# Altium PCB PCB2.PcbDoc
Units mil, origin at the board's own origin, x right, y up, seen from the top; angles counter-clockwise.
Board outline 3575 x 2655 mil, 2 copper layers (Top Layer, Bottom Layer); 31 components, 32 nets, 104 pads, 53 vias.
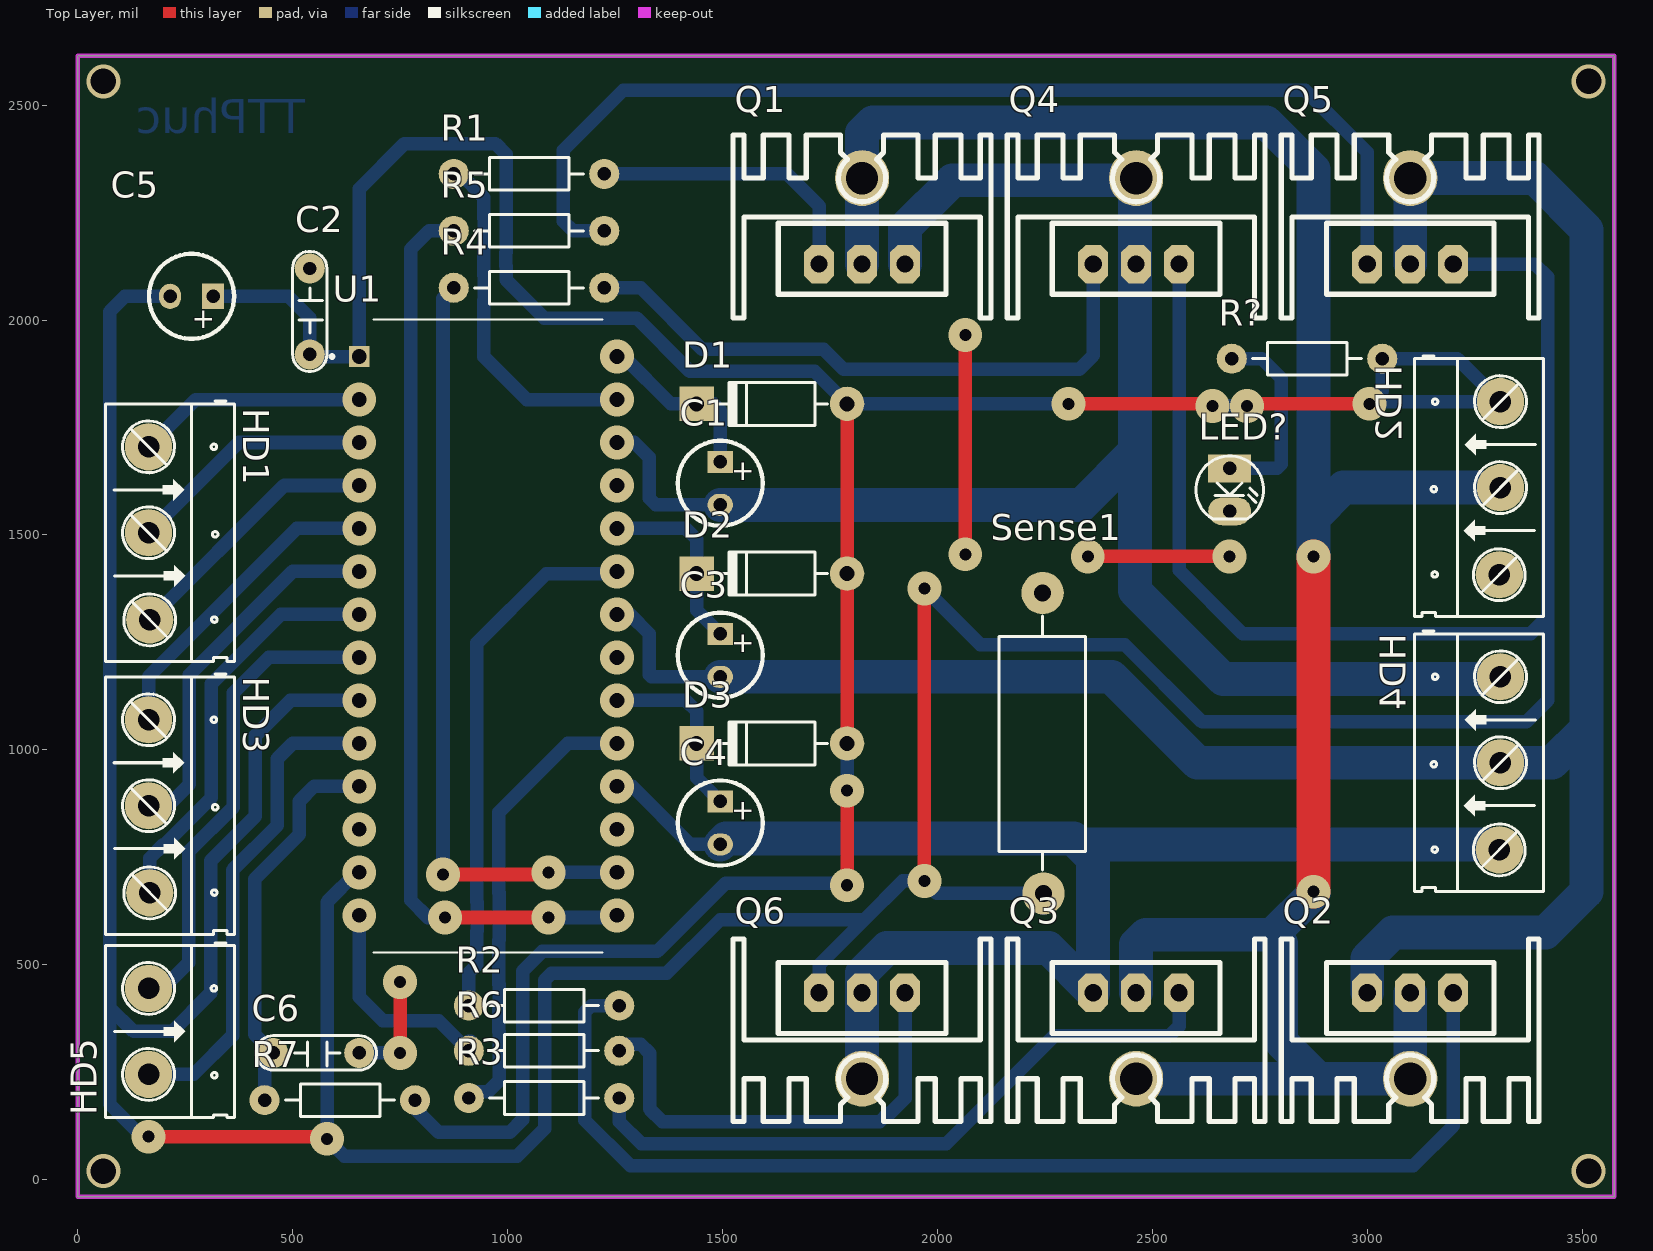
[diagram p0: Top Layer view]
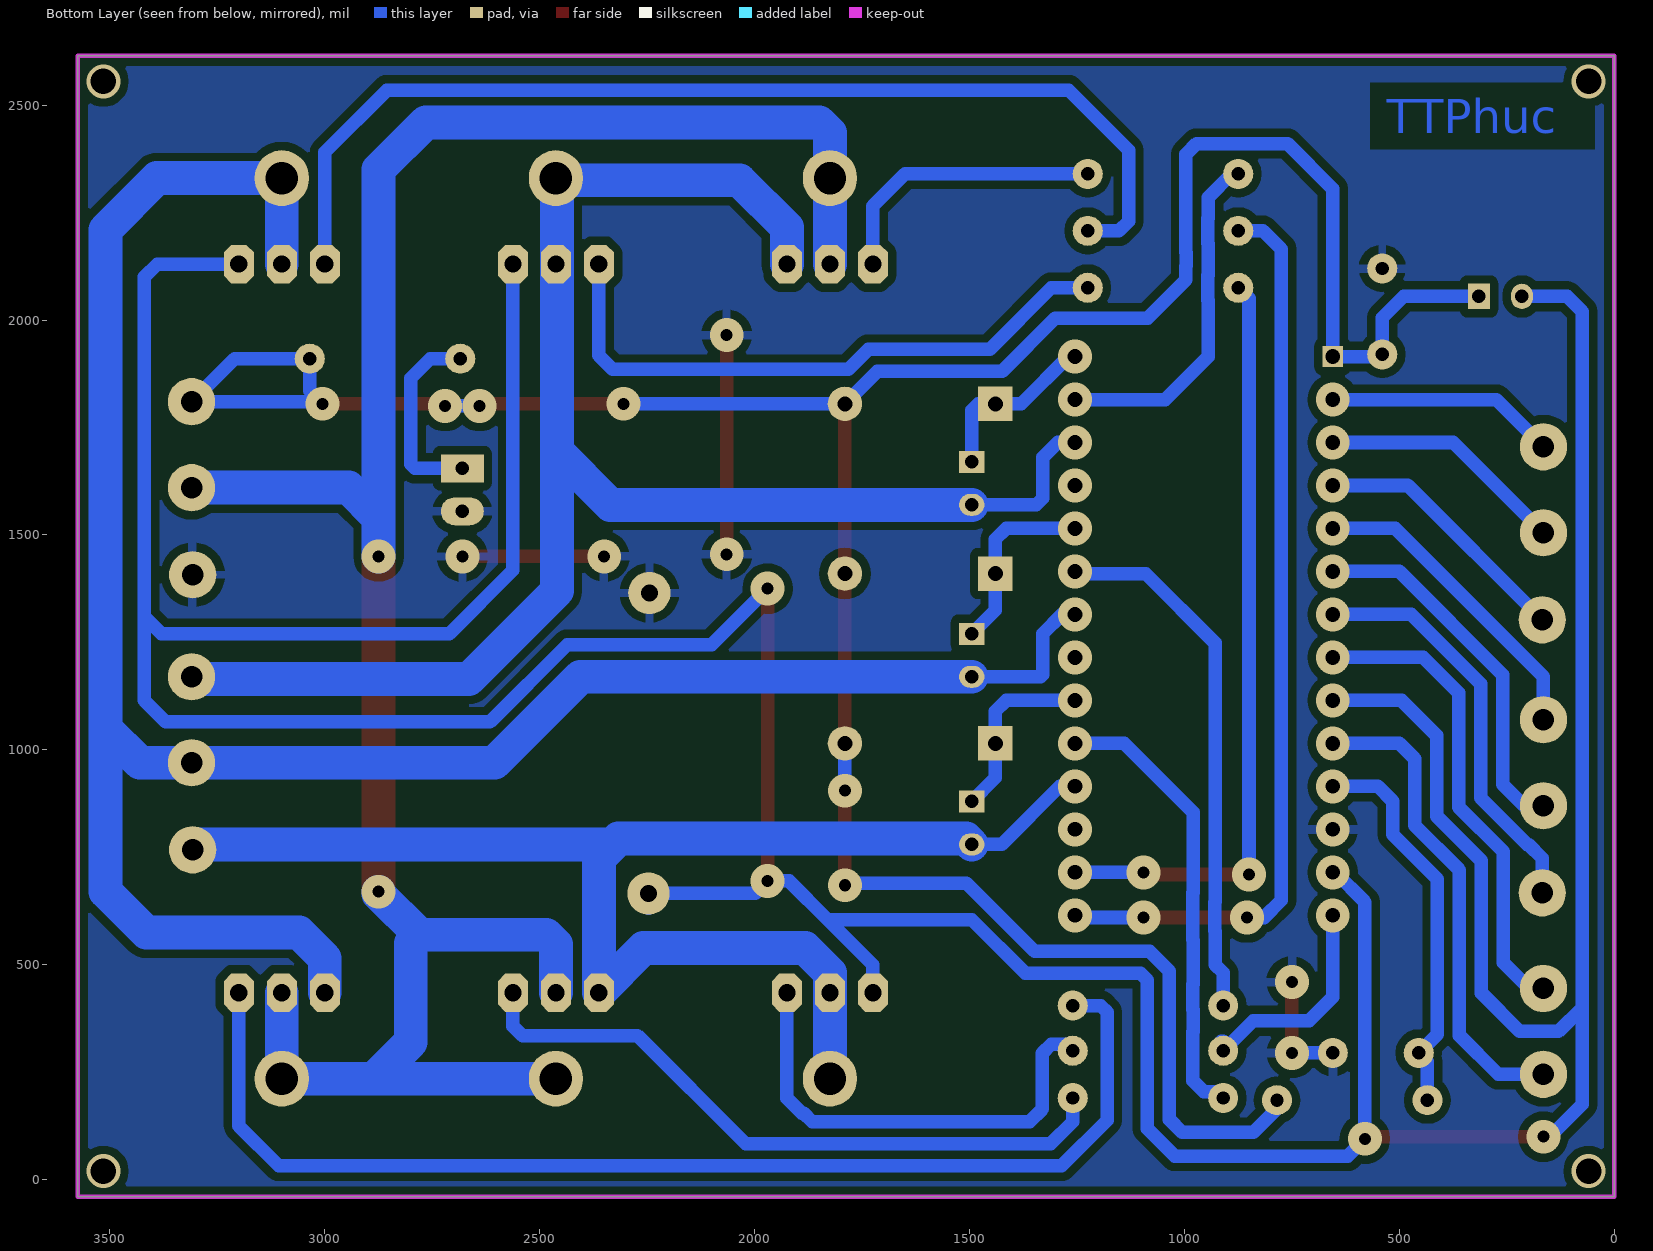
[diagram p1: Bottom Layer view, seen from below]
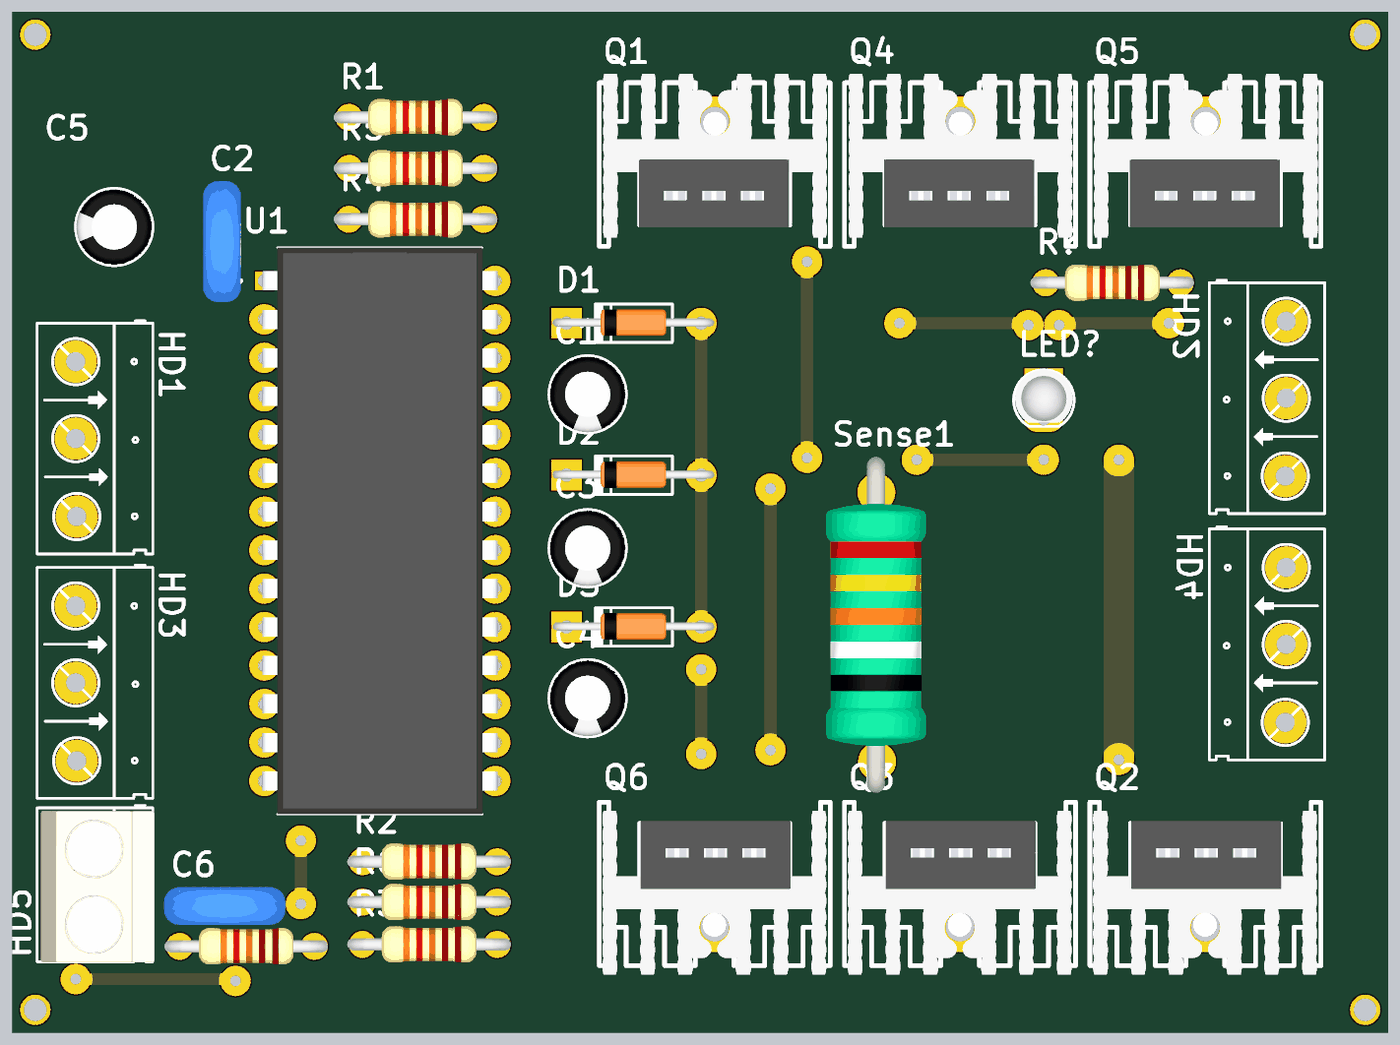
[diagram p2: 3D render of the assembled board from above, using the file's embedded part models]

## Layer stack, top to bottom
Top Solder: solder mask 0.4, Solder Resist, Dk 3.5
Top Layer: signal copper 1.4
Dielectric 1: dielectric 12.6, FR-4, Dk 4.8
Bottom Layer: signal copper 1.4
Bottom Solder: solder mask 0.4, Solder Resist, Dk 3.5

## Board outline
0,-40 0,2615 3575,2615 3575,-40

## Design rules (kind name [scope] priority, off if disabled: settings)
Clearance [All] p1: gap=19.68 ignorepadtopadclearanceinfootprint=FALSE
PolygonConnect [All] p1: connectstyle=Relief reliefconductorwidth=19.68 reliefentries=4 polygonreliefangle="90 Angle" airgapwidth=19.68
RoutingVias [All] p1: holewidth=28 width=78.74 viastyle="Through Hole" minholewidth=28 minwidth=78.74 maxholewidth=28 maxwidth=78.74
SolderMaskExpansion [All] p1: expansion=4
Width [All] p1: maxlimit=78.74 minlimit=19.68 preferedwidth=31.5
30 further rules are at their usual default settings.

## Components (designator, comment, footprint, x,y, rotation, side; value= is the part's Value field where it differs from the comment)
C1 "Cap Pol 5mm" C5mm 1495,1620 r270 top
C2 "104" CN2 540,2120 r270 top value=0.1uF
C3 "Cap Pol 5mm" C5mm 1495,1220 r270 top
C4 "Cap Pol 5mm" C5mm 1495,830 r270 top
C5 "4.7uF" CAP_POL_5MM 265,2055 r180 top
C6 "104" CN2 655,295 r180 top value=0.1uF
D1 "1N4118" D1A 1790,1805 r0 top value=1N4007
D2 "1N4118" D1A 1790,1410 r0 top value=1N4007
D3 "1N4118" D1A 1790,1015 r0 top value=1N4007
HD1 "Header 3" HED3#1 165,1705 r270 top
HD2 "Header 3" HED3#2 3310,1810 r270 top
HD3 "Header 3" HED3#1 165,1070 r270 top
HD4 "Header 3" HED3#2 3310,1170 r270 top
HD5 "Header 2" HED2 165,445 r270 top
LED? "LED" LED-3 2680,1655 r270 top value="LED 3 ly Single Colour"
Q1 "IRFZ44" QTO-220H3 1725,2130 r0 top
Q2 "IRFZ44" QTO-220H3 3200,435 r180 top
Q3 "IRFZ44" QTO-220H3 2562.5,435 r180 top
Q4 "IRFZ44" QTO-220H3 2362.5,2130 r0 top
Q5 "IRFZ44" QTO-220H3 3000,2130 r0 top
Q6 "IRFZ44" QTO-220H3 1925,435 r180 top
R1 "1k" R1/4W 875,2340 r0 top value="R1/4W - 1K"
R2 "1k" R1/4W 910,405 r0 top value="R1/4W - 1K"
R3 "1k" R1/4W 910,190 r0 top value="R1/4W - 1K"
R4 "1k" R1/4W 875,2075 r0 top value="R1/4W - 1K"
R5 "1k" R1/4W 875,2207.5 r0 top value="R1/4W - 1K"
R6 "1k" R1/4W 910,300 r0 top value="R1/4W - 1K"
R7 "10k" R1/4W 435,185 r0 top value="R1/4W - 1K"
R? "1k" R1/4W 2685,1910 r0 top value="R1/4W - 1K"
Sense1 "0.05 Ohm" R2W 2245,1365 r270 top value="R2W - 47"
U1 "IR2136" DIP1524W45P254L3740H635Q28 955,1265 r0 top

## Footprints (in the part's own frame and the unit in brackets; to place one, negate y for a bottom-side part, rotate by r counter-clockwise, add the part's x,y. Pads: shape width x height; smd on the part's side, far side on the other; paste and mask are expansions set on the pad)
C5mm [mm]
  rect 1.3x1.5 hole 0.8: 1(-1.27,0)
  oval 1.3x1.5 hole 0.8: 2(1.27,0)
  silkscreen extent -2.51,-2.51 2.51,2.51, body extent -2.5,-2.5 2.49,2.5, height 11.01
CAP_POL_5MM [mm]
  rect 1.3x1.5 hole 0.8: 1(-1.27,0)
  oval 1.3x1.5 hole 0.8: 2(1.27,0)
  silkscreen extent -2.51,-2.51 2.51,2.51, body extent -2.5,-2.5 2.49,2.5, height 11.01
CN2 [mil]
  round 70 hole 31: 1(0,0) 2(200,0)
  silkscreen extent -40,-40 240,40, body extent -54,-44 260,55, height 407
D1A [mil] "Diode 1A, W 100mil, L 350mil"
  round 80 hole 35: 1(0,0)
  rect 80x80 hole 35: 2(-350,0)
  silkscreen extent -305,-50 -45,50, body extent -386,-33 34,36, height 84
DIP1524W45P254L3740H635Q28 [mm]
  rect 1.22x1.22 / inner round 1.22 / far side rect 1.22x1.22 hole 0.87: 1(-7.62,16.51)
  round 1.22 hole 0.87: 2(-7.62,13.97) 3(-7.62,11.43) 4(-7.62,8.89) 5(-7.62,6.35) 6(-7.62,3.81) 7(-7.62,1.27) 8(-7.62,-1.27) 9(-7.62,-3.81) 10(-7.62,-6.35) 11(-7.62,-8.89) 12(-7.62,-11.43) 13(-7.62,-13.97) 14(-7.62,-16.51) 15(7.62,-16.51) 16(7.62,-13.97) 17(7.62,-11.43) 18(7.62,-8.89) 19(7.62,-6.35) 20(7.62,-3.81) 21(7.62,-1.27) 22(7.62,1.27) 23(7.62,3.81) 24(7.62,6.35) 25(7.62,8.89) 26(7.62,11.43) 27(7.62,13.97) 28(7.62,16.51)
  silkscreen extent -9.33,-18.7 6.76,18.7, body extent -7.77,-18.7 7.77,18.7, height 6.35
HED2 [mil] "Header 2, 2 pin, hight 300mil, Pin to Pin 200, Colour Green"
  round 110 hole 50: 1(0,0) 2(200,0)
  silkscreen extent -106,-100 300,200, body extent -92,-90 302,205, height 394
HED3#1 [mil] "Header 3, 3 pin, hight 300mil, Pin to Pin 200, Colour Green"
  round 110 hole 50: 1(0,0) 2(200,0) 3(402.62,2.62)
  silkscreen extent -106,-100 500,200
HED3#2 [mil] "Header 3, 3 pin, hight 300mil, Pin to Pin 200, Colour Green"
  round 110 hole 50: 1(0,0) 2(200,0) 3(402.62,-2.62)
  silkscreen extent -106,-200 500,100
LED-3 [mil] "LED 2 PIN, 3ly Only colour"
  rect 65x100 hole 32: 1(0,0)
  oval 65x100 hole 32: 2(100,0)
  silkscreen extent -29,-78 118,79, body extent -29,-75 109,75, height 256
QTO-220H3 [mil] "TO-220 1-2-3"
  oct 70x90 hole 40: 1(0,0) 2(100,0) 3(200,0)
  oval 125.98x129.92 hole 75: 2(100,200)
  silkscreen extent -200,-125 400,300, body extent -190,-102 392,323, height 984
R1/4W [mil] "R 1/4W, 2 Pin, 350mil"
  round 70 hole 31: 1(0,0) 2(350,0)
  silkscreen extent 48,-38 302,38, body extent -40,-47 386,47, height 111
R2W [mm] "R2W, 2 pin, 700mil"
  round 2.5 hole 1: 1(0,0) 2(17.755,0.051)
  silkscreen extent 1.37,-2.57 16.38,2.54, body extent -2.36,-3.33 19.84,3.27, height 8.3

## Part data
C1 C3 C4: "Polarized Capacitor (Axial)", LatestRevisionDate=17-Jul-2002, LatestRevisionNote="Re-released for DXP Platform.", PackageReference=POLAR0.8, Published=8-Jun-2000, Publisher="Altium Limited"
C2 C6: library part CN2, "Cap np 104 => 105pF"
C5: library part "Cap Pol 12mm", "Polarized Capacitor (Axial)", LatestRevisionDate=17-Jul-2002, LatestRevisionNote="Re-released for DXP Platform.", PackageReference=POLAR0.8, Published=8-Jun-2000, Publisher="Altium Limited"
D1 D2 D3: library part D1A, "Diode 1A"
HD1 HD3: "Header 3 (Green)"
HD2 HD4: library part Hed3, "Header 3 (Green)"
HD5: "Header 2 (Green)"
LED?: "LED Single colour Green and Red"
Q1 Q2 Q3 Q4 Q5 Q6: "HEXFET N-Channel Power MOSFET"
R1 R2 R3 R4 R5 R6 R7 R?: library part R1/4W, "Resistor 1/4W"
Sense1: library part R2W, "Resistor 2W"
U1: "Half-Bridge Gate Driver IC Inverting 44-PLCC, 32 Leads (16.58x16.58)", Package="DIP-28 International Rectifier", Availability="In Stock", Check_prices=https://www.snapeda.com/parts/IR2136/Infineon+Technologies/view-part/?ref=eda, MF="Infineon Technologies", MP=IR2136, Price=None, SnapEDA_Link=https://www.snapeda.com/parts/IR2136/Infineon+Technologies/view-part/?ref=snap

## Via types
v1: diameter 78.74, hole 28, Top Layer to Bottom Layer, 49 vias
v2: diameter 78.74, hole 59.06, Top Layer to Bottom Layer, 4 vias

## Nets (pads, with @x,y where several pads share a name; then routed paths per layer and width w, separated by ;. In a path a pad name is that pad's centre, name@x,y a point inside that pad or via, vN(x,y) a via of type N, cw(c..) or ccw(c..) an arc to the next point about the centre after c; other vN are vias at no path point)
COM: C5.2 Q4.3 Q5.3 Q6.3 Sense1.2 U1.9 U1.13 | length 11964.7
  Top Layer w31.5: v1(165,100) 575.39,100 v1(580.2,95.2) ; Q6.3@1720,440 Q6.3 ; v1(1970,695) v1(1970,1375)
  Bottom Layer w31.5: v1(165,100) 150,100 74.57,175.43 74.57,407.11 ; C5.2 110,2055 74.57,2019.57 74.57,407.11 ; v1(580.2,95.2) 580,95 620,55 1022.38,55 1086.18,118.8 1086.18,463.8 1102.38,480 1370,480 1495,605 1830,605 ; v1@580.2,103.62 580.2,645.98 649.21,715 v1(655,715) ; v1(655,1115) 495,1115 413.54,1033.54 413.54,845.89 309.23,741.58 309.23,434.23 220,345 130,345 75,400 75,406.68 74.57,407.11 ; Q6.3 1725,500 1830,605 ; v1(1970,1375) 2100.2,1244.8 2435.98,1244.8 2615.79,1065 3370,1065 3420,1115 3420,1310 ; Sense1.2@2247,632 Sense1.2 1999,666 v1(1970,695) 1920,695 1830,605 ; Q4.3 2562.5,1417.5 2710,1270 3380,1270 3420,1310 ; Q5.3 3390,2130 3420,2100 3420,1310
EN: HD5.2 U1.10 | length 1125.3
  Bottom Layer w31.5: HD5.2 270,245 360.41,335.41 360.41,720.38 464.72,824.69 464.72,979.72 500,1015 v1(655,1015)
FAULT: HD5.1 U1.8 | length 1115.5
  Bottom Layer w31.5: HD5.1 198.05,445 258.05,505 258.05,762.78 362.36,867.09 362.36,1132.6 444.76,1215 v1(655,1215)
GND: C2.1 C6.1 HD2.3 LED?.2 Sense1.1 U1.12 | length 1100
  Top Layer w31.5: v1(750,295) v1(750,460) ; v1(2065,1455) v1(2065,1965) ; v1(2350,1450) v1(2680,1450)
  Bottom Layer w31.5: C6.1 v1(750,295)
  other v1: 655,815
HIN1: HD1.1 U1.2 | length 535.6
  Bottom Layer w31.5: HD1.1 275,1815 v1(655,1815)
HIN2: HD1.2 U1.3 | length 577
  Bottom Layer w31.5: HD1.2 375,1715 v1(655,1715)
HIN3: HD1.3 U1.4 | length 616.9
  Bottom Layer w31.5: HD1.3 480.24,1615 v1(655,1615)
HO1: R1.1 U1.27 | length 814.9
  Bottom Layer w31.5: R1.1 890,2340 945,2285 945,2237.11 945.43,2236.67 945.43,2178.33 945,2177.89 945,2104.61 945.43,2104.17 945.43,2045.83 945,2045.39 945,1915 1045,1815 v1(1255,1815)
HO2: R2.1 U1.23 | length 1240.4
  Bottom Layer w31.5: R2.1 910,481.18 928.82,500 928.82,578.03 929.8,579.02 929.8,645.98 928.82,646.97 928.82,1248.82 1090,1410 U1.23@1250,1410
  other v1: 1255,1415
HO3: R3.1 U1.19 | length 1048.2
  Bottom Layer w31.5: R3.1@910,205 955,205 980.43,230.43 980.43,344.17 980,344.61 980,395.39 980.43,395.83 980.43,454.17 980,454.61 980,556.83 980.98,557.82 980.98,667.18 980,668.17 980,855 1140,1015 v1(1255,1015)
LIN1: HD3.1 U1.5 | length 732.9
  Bottom Layer w31.5: HD3.1 165,1170 510,1515 v1(655,1515)
LIN2: HD3.2 U1.6 | length 865.1
  Bottom Layer w31.5: HD3.2 210,870 260,920 260,1175 500,1415 v1(655,1415)
LIN3: HD3.3 U1.7 | length 958.2
  Bottom Layer w31.5: HD3.3 167.62,747.62 199.57,779.57 202.46,779.57 311.18,888.29 311.18,1153.8 472.38,1315 v1(655,1315)
LO1: R4.1 U1.16 | length 1782.4
  Top Layer w31.5: v1(850,710) 1090,710 v1(1095,715)
  Bottom Layer w31.5: v1(850,710) 850,2050 R4.1 ; v1(1095,715) v1(1255,715)
LO2: R5.1 U1.15 | length 2135.4
  Top Layer w31.5: v1(855,610) 1085,610 1090,615 v1(1095,610)
  Bottom Layer w31.5: v1(855,610) 815,610 775,650 775,2165 817.5,2207.5 R5.1 ; v1(1095,610) 1250,610 v1(1255,615)
LO3: R6.1 U1.14 | length 501.8
  Bottom Layer w31.5: v1(655,615) 655,425 710.2,369.8 840.2,369.8 R6.1 ; R6.1@910,322.5 R6.1@915,322.5
NetC1_1: C1.1 D1.2 U1.28 | length 396.8
  Bottom Layer w31.5: U1.28@1270,1915 1380,1805 D1.2 1480,1805 1495,1790 C1.1
  other v1: 1255,1915
NetC3_1: C3.1 D2.2 U1.24 | length 438.1
  Bottom Layer w31.5: v1(1255,1515) 1415,1515 1440,1490 D2.2 1440,1325 C3.1
NetC4_1: C4.1 D3.2 U1.20 | length 428.1
  Bottom Layer w31.5: v1(1255,1115) 1415,1115 1440,1090 D3.2 1440,935 C4.1
NetC6_2: C6.2 R7.1 U1.11 | length 918.6
  Bottom Layer w31.5: R7.1 435,275 C6.2 411.6,338.4 411.6,699.18 515.91,803.49 515.91,880.91 550,915 v1(655,915)
NetLED?_1: LED?.1 R?.1 | length 458.1
  Bottom Layer w31.5: LED?.1 2790.2,1655 2800.2,1665 2800.2,1864.8 2755,1910 R?.1
NetQ1_1: Q1.1 R1.2 | length 676.1
  Bottom Layer w31.5: R1.2@1220,2340 R1.2 1650,2340 1725,2265 Q1.1 Q1.1@1725,2125
NetQ2_1: Q2.1 R2.2 | length 2750.2
  Bottom Layer w31.5: R2.2 1195,405 1180,390 1180,138.39 1286.14,32.24 3107.24,32.24 3200,125 Q2.1
NetQ3_1: Q3.1 R3.2 | length 1585.2
  Bottom Layer w31.5: R3.2@1260,205 R3.2 1260,135 1311.57,83.43 2020.81,83.43 2272.77,335.39 2503.27,335.39 2503.66,335 2540,335 2562.5,357.5 Q3.1
NetQ4_1: Q4.1 R4.2 | length 1442.2
  Bottom Layer w31.5: R4.2 1310,2075 1453.39,1931.61 1735.77,1931.61 1782.38,1885 2330,1885 2362.5,1917.5 Q4.1
NetQ5_1: Q5.1 R5.2 | length 2517
  Bottom Layer w31.5: R5.2 1152.5,2207.5 1130,2230 1130,2395 1269.57,2534.57 2855.43,2534.57 3000,2390 Q5.1
NetQ6_1: Q6.1 R6.2 | length 1084.1
  Bottom Layer w31.5: R6.2@1260,315 1310,315 1330.43,294.57 1330.43,164.57 1360.39,134.61 1865.77,134.61 1886.16,155 1890.43,155 1925,189.57 Q6.1
VCC: C2.2 C5.1 D1.1 D2.1 D3.1 HD2.1 R7.2 R?.2 U1.1 | length 7014
  Top Layer w31.5: v1(1790,685) v1(1790,905) ; D3.1 D2.1 D1.1 ; v1(2305,1805) 2640,1805 v1(2640,1800) ; v1(2720,1800) 2725,1805 v1(3005,1805)
  Bottom Layer w31.5: C5.1 490,2055 540,2005 C2.2 545,1915 U1.1 655,2305 760.43,2410.43 971.95,2410.43 996.61,2385.77 996.61,2157.13 996.18,2156.69 996.18,2125.81 996.61,2125.37 996.61,2093.39 1085.43,2004.57 1300.43,2004.57 1424.57,1880.43 1714.57,1880.43 D1.1 v1(2305,1805) ; R7.2 785,165 840,110 1005,110 1035,140 1035,485 1081.18,531.18 1348.8,531.18 1507.62,690 1785,690 v1(1790,685) ; v1(1790,905) D3.1 ; v1(2640,1800) v1(2720,1800) ; v1(3005,1805) 3035,1835 R?.2 3210,1910 HD2.1 3035,1810 3030,1805 v1(3005,1805)
VM: HD2.2 Q1.2 Q2.2 Q3.2 | length 5349.4
  Top Layer w78.74: v1(2875,670) v1(2875,1450)
  Bottom Layer w78.74: Q1.2@1825,2130 1825,2330 1825,2435 1849.76,2459.76 2765.24,2459.76 2875,2350 2875,1540 ; Q3.2@2462.5,235 2885,235 ; Q3.2@2462.5,435 2462.5,547.5 2485,570 2780,570 ; v1(2875,670) 2875,665 2780,570 ; v1(2875,1450) 2875,1540 ; Q2.2@3100,435 3100,235 2885,235 ; HD2.2 2945,1610 2875,1540 ; 2780,570 2800,550 2800,320 2885,235
VS1: C1.2 HD4.1 Q1.3 Q4.2 U1.26 | length 3935
  Bottom Layer w31.5: v1(1255,1715) 1295,1715 1329.8,1680.2 1329.8,1585.2 1345,1570 C1.2
  Bottom Layer w78.74: C1.2 2335,1570 2460,1695 ; Q1.3 1925,2215 2035,2325 Q4.2@2460,2325 ; Q4.2@2460,2330 Q4.2@2460,2325 ; HD4.1 3305,1165 2665,1165 2460,1370 2460,1695 ; 2460,1695 Q4.2@2460,2325
VS2: C3.2 HD4.2 Q2.3 Q5.2 U1.22 | length 5340.6
  Bottom Layer w31.5: v1(1255,1315) 1285,1315 1329.8,1270.2 1329.8,1175.2 1335,1170 C3.2
  Bottom Layer w78.74: C3.2 2405,1170 2605,970 HD4.2 3430,970 3510,1050 ; Q2.3 3000,515 3060,575 3415,575 3510,670 3510,1050 ; Q5.2@3100,2130 3100,2330 3390,2330 3510,2210 3510,1050
VS3: C4.2 HD4.3 Q3.3 Q6.2 U1.18 | length 3333.8
  Bottom Layer w31.5: v1(1255,915) 1290,915 1425,780 C4.2
  Bottom Layer w78.74: C4.2 1508.43,793.43 2316.57,793.43 2330,780 ; Q6.2@1825,235 1825,435 1825,481.02 1883.04,539.06 2258.44,539.06 Q3.3 2362.5,747.5 2330,780 ; HD4.3 3294.76,780 2330,780
pads on no net: U1.17 U1.21 U1.25
copper on no net:
  other v1: 1255,815 1255,1215 1255,1615
  other v2: 60,20 3515,20 60,2555 3515,2555

## Polygon pours and split planes (outlines as drawn)
GND on Bottom Layer "GND_L02_P016" (solid, remove dead copper, pour order 16): 0,2615 0,-40 3575,-40 3575,2615

## Keep-outs
Keep-Out Layer:
  lines w10: 0,-40 0,60 0,2475 0,2615 3575,2615 3575,-40 0,-40

## Other copper
Bottom Layer:
  text "TTPhuc" at 530,2435 h78.74

## Text inside footprints (layer, text, board x,y; h text height)
C1: Top Overlay "+" at 1528,1675 h47.24 r270
C3: Top Overlay "+" at 1528,1275 h47.24 r270
C4: Top Overlay "+" at 1528,885 h47.24 r270
C5: Top Overlay "+" at 320,2022 h47.24 r180